# EAGLE board transistortester (EAGLE 7.5.0)
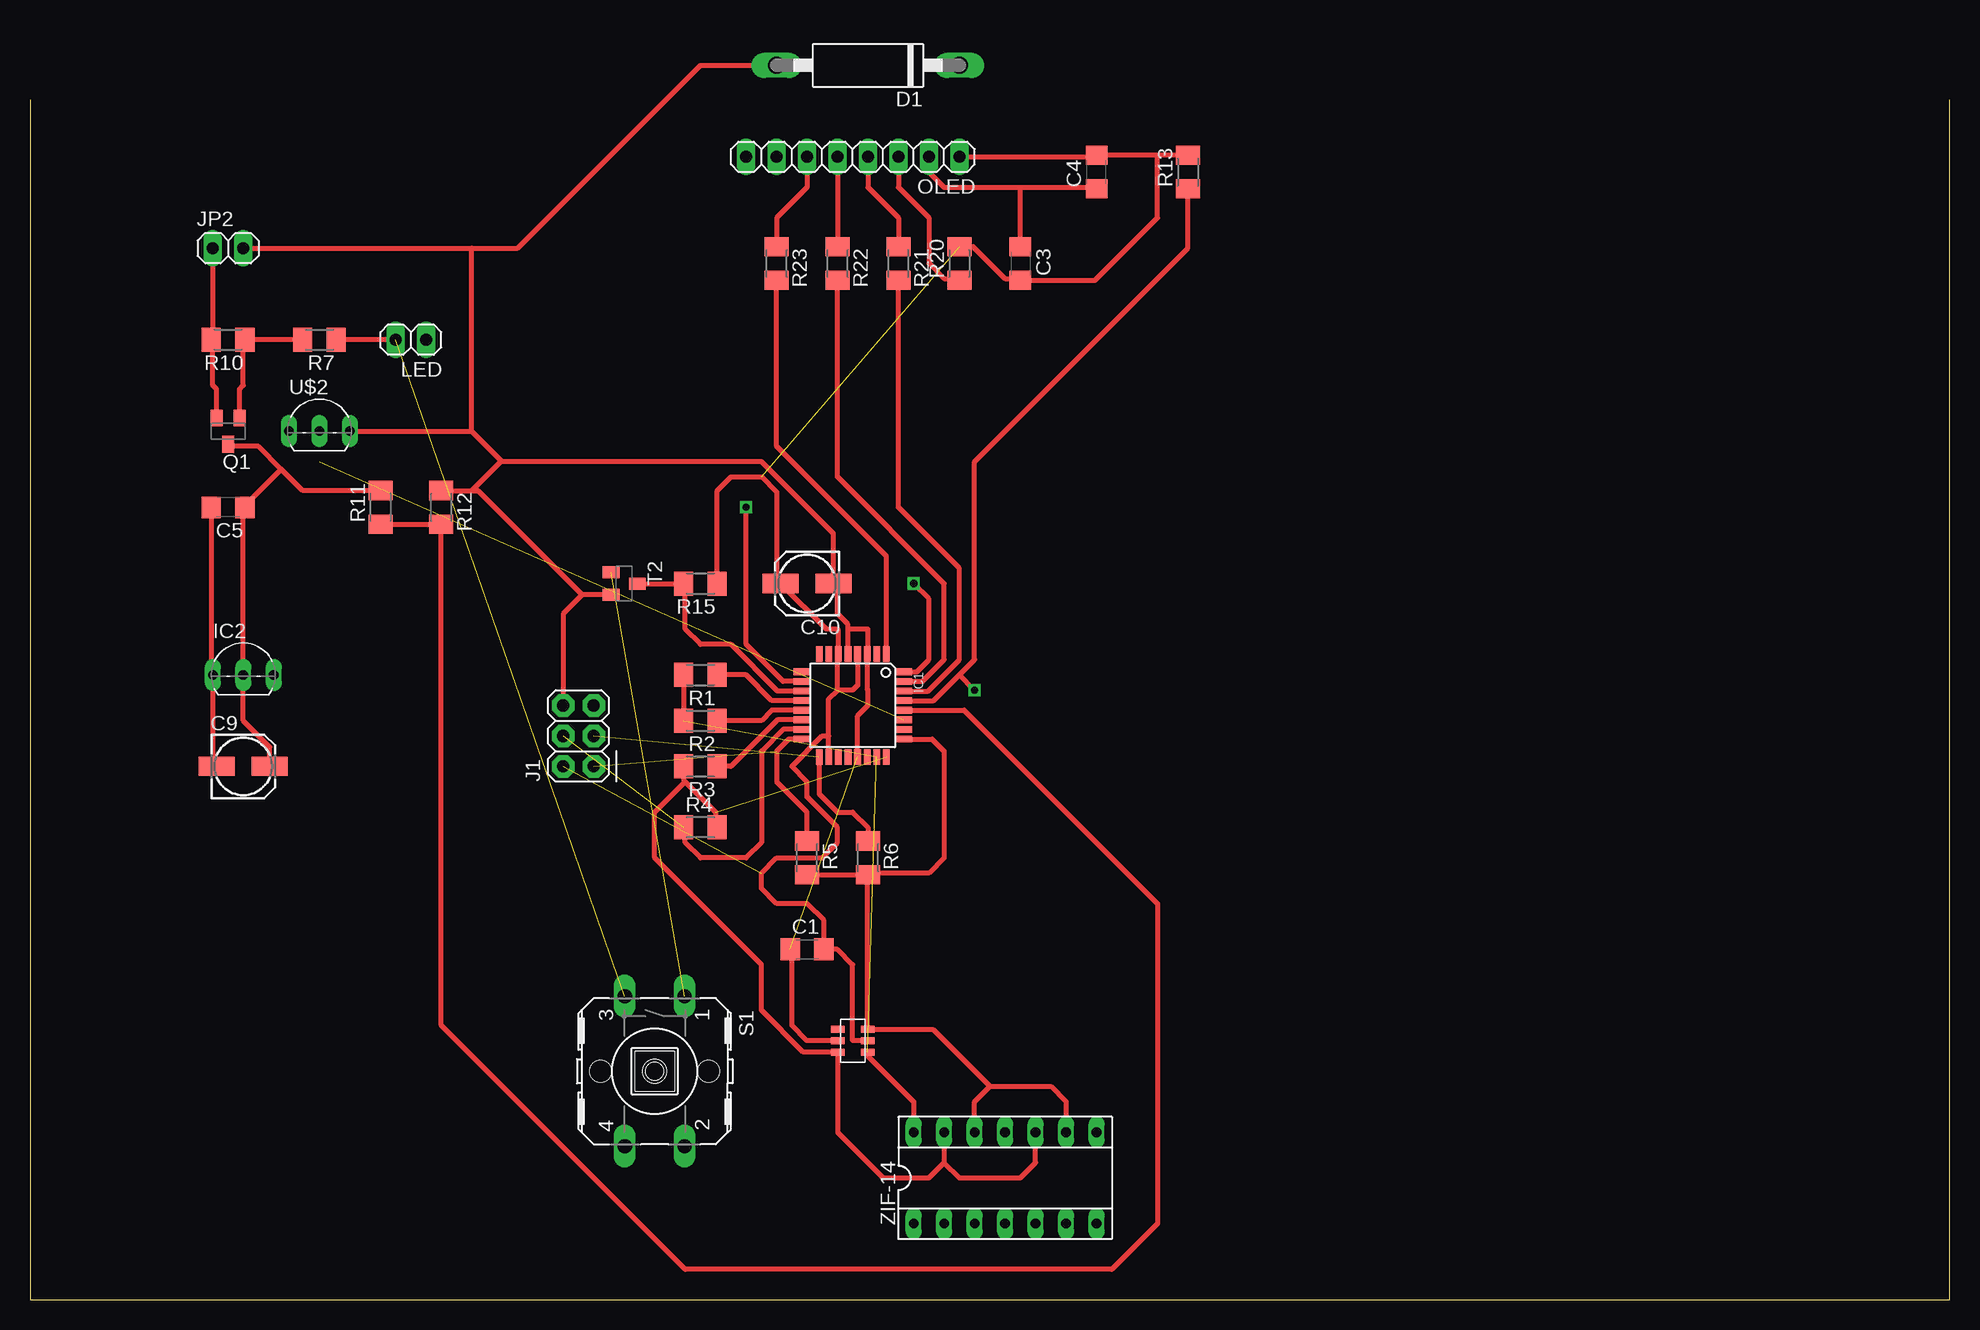
[diagram p0: board, top side]
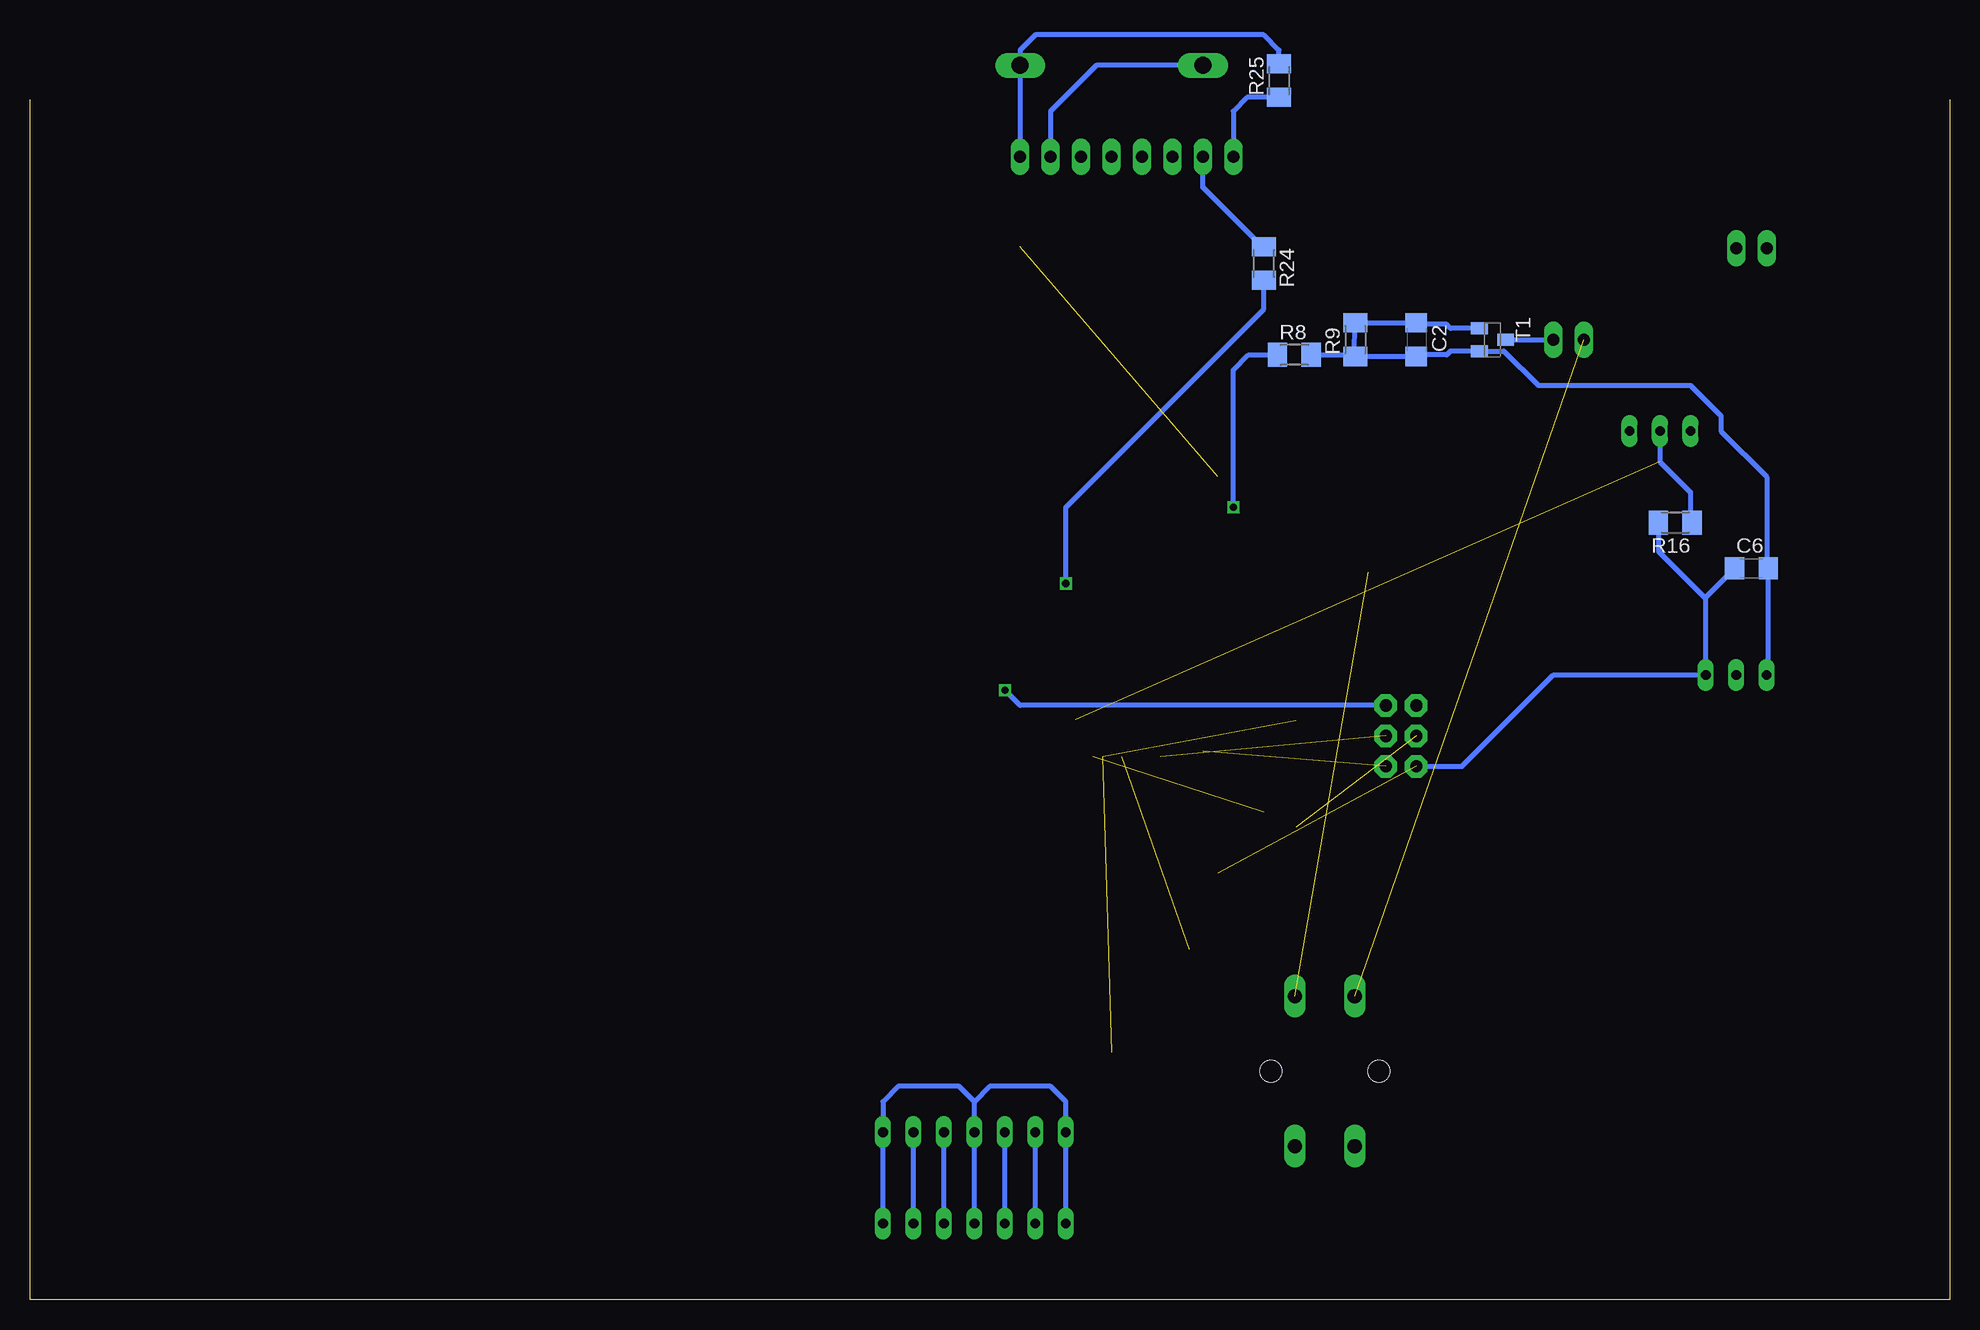
[diagram p1: board, bottom side, seen from below]

Size 160 x 100 mm. Coordinates in mm from the lower left corner, seen from the top.
Outline: 160,100 160,0 0,0 0,100
Copper layers (1*16): Top 0.035mm / dielectric 1.5mm / Bottom 0.035mm
Design rules "default": minimum track width 10mil, minimum drill 24mil, track to track 8mil, track to pad 8mil, pad to pad 8mil, via to via 8mil, smd to smd 8mil, copper to edge 40mil, drill to drill 8mil, minimum pad ring 10mil, minimum via ring 8mil, stop-mask expansion 4mil, vias tented up to drill 0mil, thermal gap 10mil

## Footprints (pad centres in the part's own frame; a part is rotated, then mirrored left to right if it is on the bottom)
C1206 = smd 1.6 x 1.8: 1 -1.4,0; 2 1.4,0
153CLV-0505 = smd 3 x 1.6: + 2.2,0; - -2.2,0
CB417-15 = drill 1.397 long: A 7.62,0; C -7.62,0
TQFP32-08 = smd 1.27 x 0.559: 1 -4.293,2.8; 2 -4.293,2; 3 -4.293,1.2; 4 -4.293,0.4; 5 -4.293,-0.4; 6 -4.293,-1.2; 7 -4.293,-2; 8 -4.293,-2.8; 17 4.293,-2.8; 18 4.293,-2; 19 4.293,-1.2; 20 4.293,-0.4; 21 4.293,0.4; 22 4.293,1.2; 23 4.293,2; 24 4.293,2.8 | smd 0.559 x 1.27: 9 -2.8,-4.293; 10 -2,-4.293; 11 -1.2,-4.293; 12 -0.4,-4.293; 13 0.4,-4.293; 14 1.2,-4.293; 15 2,-4.293; 16 2.8,-4.293; 25 2.8,4.293; 26 2,4.293; 27 1.2,4.293; 28 0.4,4.293; 29 -0.4,4.293; 30 -1.2,4.293; 31 -2,4.293; 32 -2.8,4.293
TO92-BCE = drill 0.813 long: B -2.54,0; C 0,0; E 2.54,0
2X03 = drill 1.016 pad 1.88 octagon: 1 -2.54,-1.27; 2 -2.54,1.27; 3 0,-1.27; 4 0,1.27; 5 2.54,-1.27; 6 2.54,1.27
1X02 = drill 1.016 long: 1 -1.27,0; 2 1.27,0
1X08 = drill 1.016 long: 1 -8.89,0; 2 -6.35,0; 3 -3.81,0; 4 -1.27,0; 5 1.27,0; 6 3.81,0; 7 6.35,0; 8 8.89,0
SOT23-BEC = smd 1 x 1.4: B -0.95,-1.1; C 0,1.1; E 0.95,-1.1
M1206 = smd 1.6 x 2: 1 -1.4,0; 2 1.4,0
B3F-40XX = drill 1.194 long: 1 -6.248,2.489; 2 6.248,2.489; 3 -6.248,-2.489; 4 6.248,-2.489 | hole 1.803: 0,-4.496; 0,4.496
SOT23-6 = smd 0.6 x 1.1: 1 -0.95,-1.25; 2 0,-1.25; 3 0.95,-1.25; 4 0.95,1.25; 5 0,1.25; 6 -0.95,1.25
SOCKET-14 = drill 0.813 long: 1 -7.62,-3.81; 2 -5.08,-3.81; 3 -2.54,-3.81; 4 0,-3.81; 5 2.54,-3.81; 6 5.08,-3.81; 7 7.62,-3.81; 8 7.62,3.81; 9 5.08,3.81; 10 2.54,3.81; 11 0,3.81; 12 -2.54,3.81; 13 -5.08,3.81; 14 -7.62,3.81

## Placement (x,y rotation side)
C1  100n  [C1206]  64.77,29.21 0 top
C2  10n  [C1206]  44.45,80.01 270 bottom
C3  100n  [C1206]  82.55,86.36 270 top
C4  100n  [C1206]  88.9,93.98 90 top
C5  100n  [C1206]  16.51,66.04 180 top
C6  100n  [C1206]  16.51,60.96 0 bottom
C9  10u  [153CLV-0505]  17.78,44.45 0 top
C10  10u  [153CLV-0505]  64.77,59.69 180 top
D1  P6KEXX  [CB417-15]  69.85,102.87 180 top
IC1  MEGA8-AI  [TQFP32-08]  68.58,49.53 270 top
IC2  MCP1702  [TO92-BCE]  17.78,52.07 0 top
J1  [2X03]  45.72,46.99 90 top
JP2  [1X02]  16.51,87.63 0 top
LED  [1X02]  31.75,80.01 180 top
OLED  [1X08]  68.58,95.25 180 top
Q1  BC557  [SOT23-BEC]  16.51,72.39 180 top
R1  680  [M1206]  55.88,52.07 180 top
R2  470K  [M1206]  55.88,48.26 180 top
R3  680  [M1206]  55.88,44.45 180 top
R4  470K  [M1206]  55.88,39.37 0 top
R5  680  [M1206]  64.77,36.83 270 top
R6  470K  [M1206]  69.85,36.83 270 top
R7  3K3  [M1206]  24.13,80.01 180 top
R8  27K  [M1206]  54.61,78.74 0 bottom
R9  100K  [M1206]  49.53,80.01 90 bottom
R10  33K  [M1206]  16.51,80.01 180 top
R11  10K  [M1206]  29.21,66.04 90 top
R12  3K3  [M1206]  34.29,66.04 270 top
R13  10K  [M1206]  96.52,93.98 90 top
R15  27K  [M1206]  55.88,59.69 180 top
R16  2K2  [M1206]  22.86,64.77 180 bottom
R20  10k  [M1206]  77.47,86.36 90 top
R21  10k  [M1206]  72.39,86.36 270 top
R22  10k  [M1206]  67.31,86.36 270 top
R23  10k  [M1206]  62.23,86.36 270 top
R24  10k  [M1206]  57.15,86.36 270 bottom
R25  39  [M1206]  55.88,101.6 90 bottom
S1  [B3F-40XX]  52.07,19.05 270 top
T1  BC547  [SOT23-BEC]  38.1,80.01 270 bottom
T2  BC547  [SOT23-BEC]  49.53,59.69 270 top
U$2  LM336-TO92  [TO92-BCE]  24.13,72.39 0 top
U$3  SRV05-4  [SOT23-6]  68.58,21.59 270 top
ZIF-14  [SOCKET-14]  81.28,10.16 0 top

## Library data of the parts
C1-C6 R1-R13 R15 R16 R20-R25 = rcl
C9 C10 = resistor
D1 = diode
IC1 = atmel; MPN: ATMEGA8-16AU; OC_FARNELL: 9171371; OC_NEWARK: 73M8863
IC2 U$2 U$3 = mylib
J1 = SparkFun-Connectors
JP2 LED OLED = pinhead
Q1 T1 T2 = transistor
S1 = switch-omron; MF: OMRON COMPONENTS USA; MPN: B3F-4000; OC_FARNELL: 176434; OC_NEWARK: 36K3105
ZIF-14 = ic-package

## Nets
+9V: C5.1 C9.+ IC2.C Q1.C R11.2
GND: C1.1 C3.1 C4.1 C10.- D1.A IC1.3 IC1.5 IC1.21 J1.6 JP2.2 OLED.2 R12.1 T2.E U$2.E U$3.2
LED: LED.1 T1.C
N$1: Q1.B R7.2 R10.1
N$2: IC1.28 R11.1 R12.2
N$3: IC1.23 R1.2 R2.2 U$3.4 ZIF-14.1 ZIF-14.4 ZIF-14.7 ZIF-14.8 ZIF-14.11 ZIF-14.14
N$4: IC1.12 R1.1
N$5: IC1.11 R15.2 T2.C
N$6: IC1.16 J1.1 R5.1
N$7: IC1.13 R2.1
N$8: IC1.15 J1.4 R4.1
N$9: IC1.17 J1.3 R6.1
N$10: IC1.24 R3.2 R4.2 U$3.3 ZIF-14.2 ZIF-14.5 ZIF-14.10 ZIF-14.13
N$11: IC1.14 R3.1
N$12: IC1.10 R8.1
N$13: IC1.27 R16.1 U$2.C
N$14: S1.1 T2.B
N$15: LED.2 R7.1 S1.3
N$16: OLED.8 R25.1
N$17: C2.1 R8.2 R9.2 T1.B
N$18: C2.2 C5.2 C6.2 C9.- IC2.B R9.1 T1.E
N$19: OLED.3 R20.1
N$20: OLED.4 R21.1
N$21: IC1.30 R21.2
N$22: OLED.5 R22.1
N$23: JP2.1 Q1.E R10.2
N$28: IC1.29 J1.5 R13.1
N$30: OLED.6 R23.1
N$31: OLED.7 R24.1
N$33: IC1.31 R22.2
N$34: IC1.1 R23.2
N$35: IC1.32 R24.2
PROBES: IC1.25 R5.2 R6.2 U$3.6 ZIF-14.3 ZIF-14.6 ZIF-14.9 ZIF-14.12
VCC: C1.2 C3.2 C4.2 C6.1 C10.+ D1.C IC1.4 IC1.6 IC1.18 IC2.E J1.2 OLED.1 R13.2 R15.1 R16.2 R20.2 R25.2 U$3.5

## Tracks (layer width: path | path; a pad name or v marks a point on that pad's centre or on a via)
+9V
  Top 0.406: C9.+ 19.98,46.06 17.78,48.26 IC2.C 17.78,65.91 C5.1 17.91,66.17 20.95,69.22 | R11.2 22.73,67.44 20.95,69.22 | 20.95,69.22 19.05,71.12 16.68,71.12 Q1.C
GND  (1 unrouted)
  Top 0.406: OLED.2 74.93,93.98 76.2,92.71 82.55,92.71 | 82.55,92.71 88.77,92.71 C4.1 | C3.1 82.55,92.71 | IC1.5 68.18,55.88 | 68.18,55.88 68.18,56.28 67.31,57.15 67.31,59.35 C10.- 66.97,63.84 60.96,69.85 39.37,69.85 | 68.18,55.88 69.85,55.88 69.85,53.89 IC1.3 69.78,50.87 69.85,50.8 69.85,49.53 68.98,48.66 IC1.21 | U$3.2 64.77,21.59 63.5,22.86 63.5,29.08 C1.1 | T2.E 46.04,58.74 | 46.04,58.74 44.45,57.15 J1.6 | R12.1 36.83,67.44 | 36.83,67.44 37.34,67.44 46.04,58.74 | 39.37,69.85 39.24,69.85 36.83,67.44 | U$2.E 36.83,72.39 | 36.83,72.39 39.37,69.85 | JP2.2 36.83,87.63 | 36.83,87.63 40.64,87.63 55.88,102.87 D1.A | 36.83,72.39 36.83,87.63
  Bottom 0.406: D1.A 71.12,102.87 74.93,99.06 OLED.2
LED
  Bottom 0.406: T1.C LED.1
N$1
  Top 0.406: Q1.B 17.46,75.88 17.78,76.2 17.78,79.88 R10.1 R7.2
N$2
  Top 0.406: R11.1 R12.2 34.29,22.86 54.61,2.54 90.17,2.54 93.98,6.35 93.98,33.02 77.87,49.13 IC1.28
N$3  (2 unrouted)
  Top 0.406: R1.2 R2.2 | U$3.4 69.83,20.34 73.66,16.51 ZIF-14.14
  Bottom 0.406: ZIF-14.7 ZIF-14.8 88.9,16.51 87.63,17.78 82.55,17.78 81.28,16.51 | ZIF-14.4 ZIF-14.11 81.28,16.51 | ZIF-14.1 ZIF-14.14 73.66,16.51 74.93,17.78 80.01,17.78 81.28,16.51
N$4
  Top 0.406: IC1.12 61.83,49.93 59.69,52.07 R1.1
N$5
  Top 0.406: T2.C R15.2 54.61,59.56 54.61,55.88 55.88,54.61 58.42,54.61 62.3,50.73 IC1.11
N$6  (1 unrouted)
  Top 0.406: R5.1 64.77,40.64 62.23,43.18 62.23,45.72 63.24,46.73 IC1.16
N$7
  Top 0.406: IC1.13 61.83,49.13 60.96,48.26 R2.1
N$8  (1 unrouted)
  Top 0.406: IC1.15 62.77,47.53 60.96,45.72 60.96,38.1 59.69,36.83 55.88,36.83 54.61,38.1 54.61,39.24 R4.1
N$9  (1 unrouted)
  Top 0.406: IC1.17 65.78,42.17 67.31,40.64 68.58,40.64 69.85,39.37 R6.1
N$10  (1 unrouted)
  Top 0.406: ZIF-14.13 76.2,11.43 | 76.2,11.43 77.47,10.16 82.55,10.16 83.82,11.43 ZIF-14.10 | 76.2,11.43 74.93,10.16 71.12,10.16 67.33,13.95 U$3.3 64.45,20.64 60.96,24.13 60.96,27.94 52.07,36.83 52.07,40.64 54.61,43.18 | R3.2 54.48,43.31 54.61,43.18 | 54.61,43.18 57.15,40.64 57.15,39.5 R4.2
  Bottom 0.406: ZIF-14.5 ZIF-14.10 | ZIF-14.2 ZIF-14.13
N$11
  Top 0.406: IC1.14 62.3,48.33 58.42,44.45 R3.1
N$12  (via drill 0.6)
  Top 0.406: IC1.10 62.77,51.53 59.69,54.61 v59.69,66.04
  Bottom 0.406: v59.69,66.04 59.69,77.47 58.42,78.74 R8.1
N$13  (1 unrouted)
  Bottom 0.406: U$2.C 24.13,69.85 21.59,67.31 21.59,64.9 R16.1
N$14  (1 unrouted)
N$15  (1 unrouted)
  Top 0.406: LED.2 R7.1
N$16
  Bottom 0.406: R25.1 58.55,100.2 59.69,99.06 OLED.8
N$17
  Bottom 0.406: R8.2 49.66,78.74 R9.2 C2.1 44.32,81.28 41.91,81.28 41.59,80.96 T1.B
N$18
  Top 0.406: C9.- 15.24,44.79 IC2.B 15.11,52.2 C5.2
  Bottom 0.406: IC2.B 15.11,52.2 C6.2 15.24,61.09 15.24,68.58 19.05,72.39 19.05,73.66 21.59,76.2 34.29,76.2 37.15,79.06 T1.E 41.59,79.06 41.91,78.74 44.32,78.74 C2.2 R9.1
N$19
  Top 0.406: OLED.3 72.39,92.71 74.93,90.17 74.93,86.36 76.2,85.09 77.34,85.09 R20.1
N$20
  Top 0.406: OLED.4 69.85,92.71 72.39,90.17 R21.1
N$21
  Top 0.406: IC1.30 74.86,50.73 77.47,53.34 77.47,60.96 72.39,66.04 R21.2
N$22
  Top 0.406: OLED.5 R22.1
N$23
  Top 0.406: Q1.E 15.56,75.88 15.24,76.2 15.24,79.88 R10.2 15.24,80.14 JP2.1
N$28  (via drill 0.6)
  Top 0.406: IC1.29 75.33,49.93 77.47,52.07 | 77.47,52.07 78.74,53.34 78.74,69.85 96.52,87.63 R13.1 | v78.74,50.8 77.47,52.07
  Bottom 0.406: J1.5 77.47,49.53 v78.74,50.8
N$30
  Top 0.406: OLED.6 64.77,92.71 62.23,90.17 R23.1
N$31
  Bottom 0.406: R24.1 57.28,87.76 62.23,92.71 OLED.7
N$33
  Top 0.406: IC1.31 74.39,51.53 76.2,53.34 76.2,59.69 67.31,68.58 R22.2
N$34
  Top 0.406: IC1.1 71.38,61.97 62.23,71.12 R23.2
N$35  (via drill 0.6)
  Top 0.406: IC1.32 73.92,52.33 74.93,53.34 74.93,58.42 v73.66,59.69
  Bottom 0.406: v73.66,59.69 73.66,66.04 57.15,82.55 R24.2
PROBES
  Top 0.406: ZIF-14.12 78.74,16.51 80.01,17.78 | 80.01,17.78 85.09,17.78 86.36,16.51 ZIF-14.9 | 80.01,17.78 75.25,22.54 U$3.6 69.83,35.41 R6.2 | R5.2 R6.2 | IC1.25 75.19,46.73 76.2,45.72 76.2,36.83 74.93,35.56 69.98,35.56 R6.2
  Bottom 0.406: ZIF-14.6 ZIF-14.9 | ZIF-14.3 ZIF-14.12
VCC  (2 unrouted)
  Top 0.406: R13.2 93.98,95.38 | 93.98,95.38 C4.2 88.77,95.25 OLED.1 | 93.98,95.38 93.98,90.17 88.77,84.96 C3.2 82.42,85.09 81.28,85.09 78.61,87.76 R20.2 | U$3.5 68.58,21.59 68.58,27.94 67.31,29.21 C1.2 66.17,31.62 64.77,33.02 62.23,33.02 60.96,34.29 60.96,35.56 62.23,36.83 66.04,36.83 67.31,38.1 67.31,39.37 64.77,41.91 64.77,43.18 63.5,44.45 66.04,46.99 66.58,46.99 | IC1.18 66.58,46.99 | 66.58,46.99 66.58,50.07 67.31,50.8 | 67.31,50.8 67.31,53.75 IC1.6 67.38,55.81 67.31,55.88 66.38,55.88 C10.+ 62.23,60.03 62.23,67.31 60.96,68.58 58.42,68.58 57.28,67.44 R15.1 | IC1.4 68.98,51.2 68.58,50.8 67.31,50.8
  Bottom 0.406: 20.32,58.42 IC2.E 33.02,52.07 40.64,44.45 J1.2 | 20.32,58.42 20.32,58.55 C6.1 | R16.2 24.26,62.36 20.32,58.42 | OLED.1 D1.C 77.47,104.14 76.2,105.41 57.15,105.41 55.88,104.14 R25.2